# Altium PCB Battery PCB 8x4.PcbDoc
Units mm, origin at the board's own origin, x right, y up, seen from the top; angles counter-clockwise.
Board outline 138 x 291 mm, 2 copper layers (Top Layer, Bottom Layer), stack 1.571 mm thick; 37 components, 17 nets, 126 pads, 0 vias.
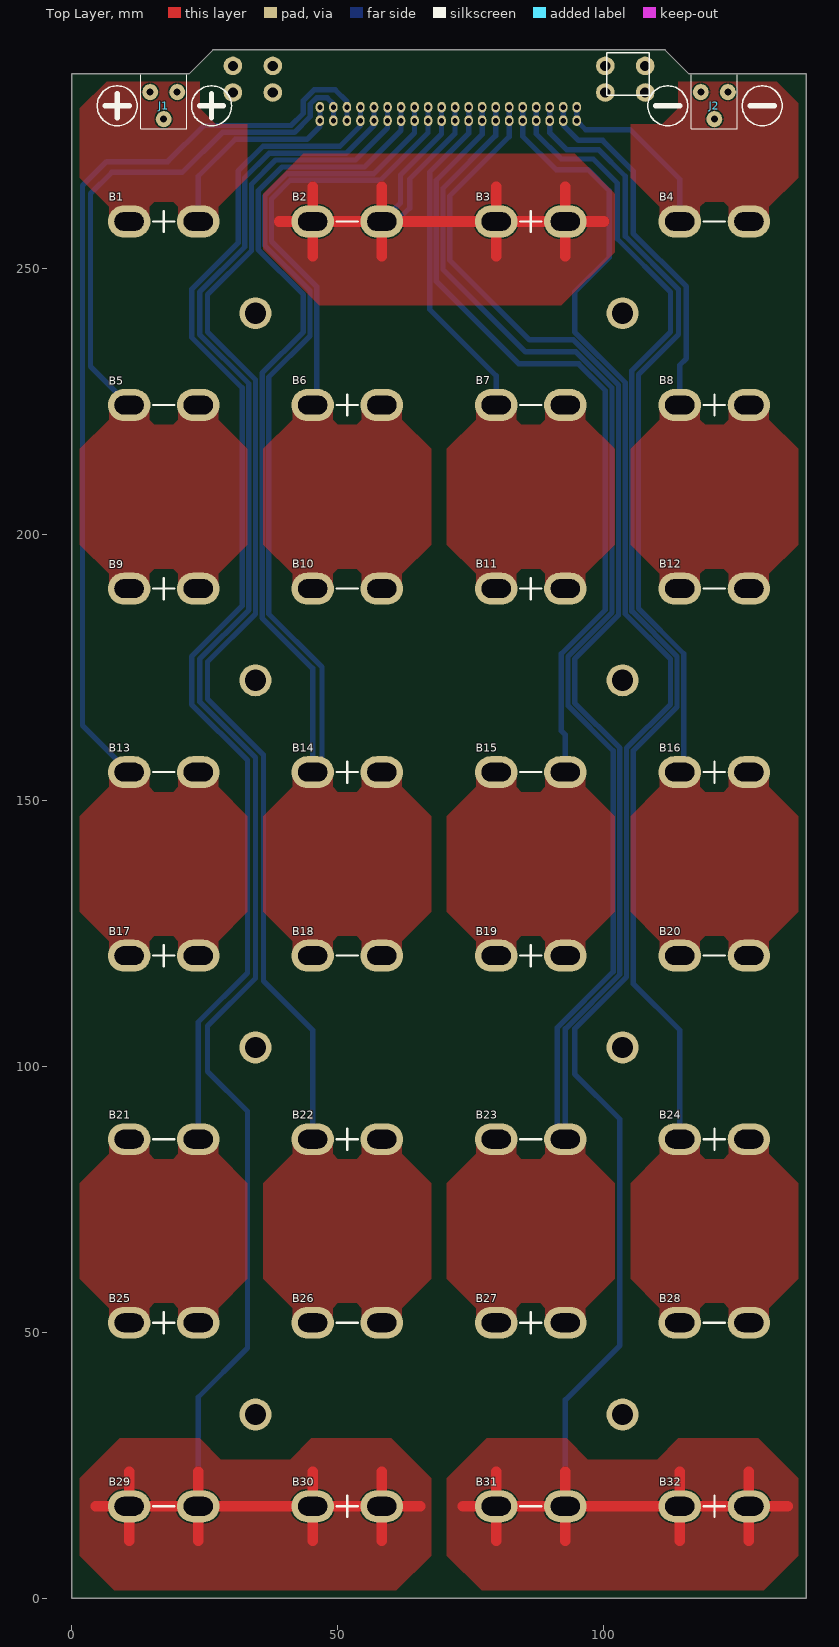
[diagram p0: Top Layer view]
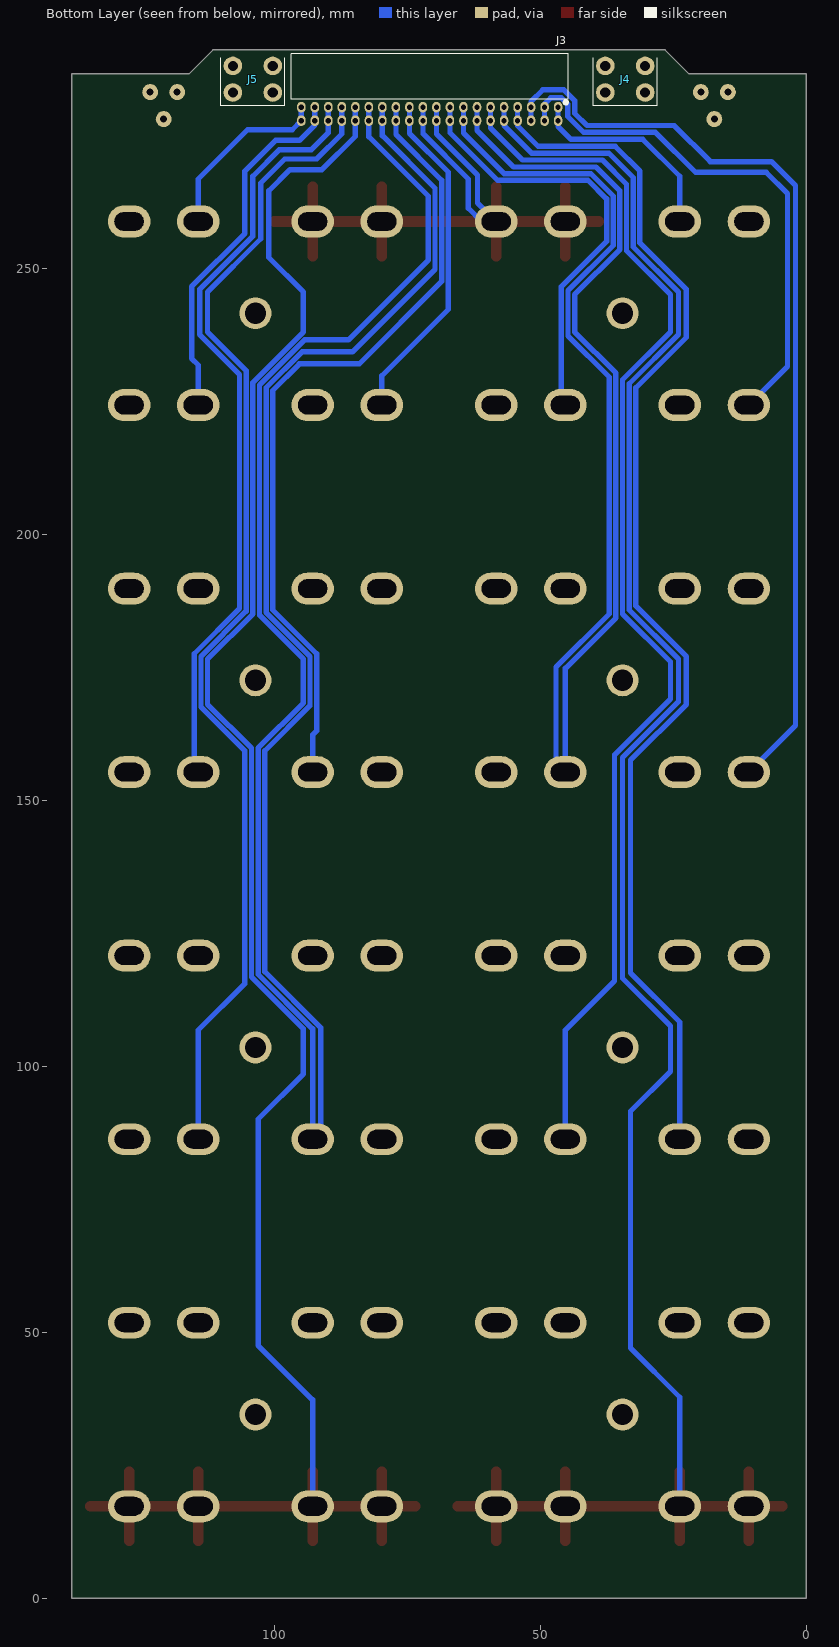
[diagram p1: Bottom Layer view, seen from below]

## Layer stack, top to bottom
Top Solder: solder mask 0.0102, Solder Resist, Dk 3.5
Top Layer: signal copper 0.0356
Dielectric 1: dielectric 1.5, FR-4, Dk 4.8
Bottom Layer: signal copper 0.0356
Bottom Solder: solder mask 0.0102, Solder Resist, Dk 3.5

## Board outline
0,0 0,286.5 22,286.5 26.5,291 111.5,291 116,286.5 138,286.5 138,0

## Design rules (kind name [scope] priority, off if disabled: settings)
Clearance [All] p1: gap=0.254 ignorepadtopadclearanceinfootprint=FALSE except(0: Arc-Hole Track-Hole SMDPad-Hole THPad-Hole Via-Hole Fill-Hole Poly-Hole Region-Hole Text-Hole)
PolygonConnect PolygonConnect_NoRelief [Name = 'NoRelief'] p1: connectstyle=Direct reliefconductorwidth=0.254 reliefentries=4 polygonreliefangle="90 Angle" airgapwidth=0.254
PolygonConnect [All] p2: connectstyle=Relief reliefconductorwidth=0.254 reliefentries=4 polygonreliefangle="90 Angle" airgapwidth=0.254
RoutingVias [All] p1: holewidth=0.711 width=1.27 viastyle="Through Hole" minholewidth=0.711 minwidth=1.27 maxholewidth=0.711 maxwidth=1.27
SolderMaskExpansion [All] p1: expansion=0.102 istentingtop=FALSE
Width [All] p1 off: maxlimit=0.254 minlimit=0.254 preferedwidth=0.254
30 further rules are at their usual default settings.

## Components (designator, comment, footprint, x,y, rotation, side; value= is the part's Value field where it differs from the comment)
B1 "Positive side of battery" BF_BATT_P 17.25,258.75 r180 top
B2 "Negative side of battery" BF_BATT_N 51.75,258.75 r180 top
B3 "Positive side of battery" BF_BATT_P 86.25,258.75 r180 top
B4 "Negative side of battery" BF_BATT_N 120.75,258.75 r180 top
B5 "Negative side of battery" BF_BATT_N 17.25,224.25 r180 top
B6 "Positive side of battery" BF_BATT_P 51.75,224.25 r180 top
B7 "Negative side of battery" BF_BATT_N 86.25,224.25 r180 top
B8 "Positive side of battery" BF_BATT_P 120.75,224.25 r180 top
B9 "Positive side of battery" BF_BATT_P 17.25,189.75 r180 top
B10 "Negative side of battery" BF_BATT_N 51.75,189.75 r180 top
B11 "Positive side of battery" BF_BATT_P 86.25,189.75 r180 top
B12 "Negative side of battery" BF_BATT_N 120.75,189.75 r180 top
B13 "Negative side of battery" BF_BATT_N 17.25,155.25 r180 top
B14 "Positive side of battery" BF_BATT_P 51.75,155.25 r180 top
B15 "Negative side of battery" BF_BATT_N 86.25,155.25 r180 top
B16 "Positive side of battery" BF_BATT_P 120.75,155.25 r180 top
B17 "Positive side of battery" BF_BATT_P 17.25,120.75 r180 top
B18 "Negative side of battery" BF_BATT_N 51.75,120.75 r180 top
B19 "Positive side of battery" BF_BATT_P 86.25,120.75 r180 top
B20 "Negative side of battery" BF_BATT_N 120.75,120.75 r180 top
B21 "Negative side of battery" BF_BATT_N 17.25,86.25 r180 top
B22 "Positive side of battery" BF_BATT_P 51.75,86.25 r180 top
B23 "Negative side of battery" BF_BATT_N 86.25,86.25 r180 top
B24 "Positive side of battery" BF_BATT_P 120.75,86.25 r180 top
B25 "Positive side of battery" BF_BATT_P 17.25,51.75 r180 top
B26 "Negative side of battery" BF_BATT_N 51.75,51.75 r180 top
B27 "Positive side of battery" BF_BATT_P 86.25,51.75 r180 top
B28 "Negative side of battery" BF_BATT_N 120.75,51.75 r180 top
B29 "Negative side of battery" BF_BATT_N 17.25,17.25 r180 top
B30 "Positive side of battery" BF_BATT_P 51.75,17.25 r180 top
B31 "Negative side of battery" BF_BATT_N 86.25,17.25 r180 top
B32 "Positive side of battery" BF_BATT_P 120.75,17.25 r180 top
J1 "Conn QC TAB 0.250 RA TH" 4910 17.25,278 r180 top value=4910
J2 "Conn QC TAB 0.250 RA TH" 4910 120.75,278 r180 top value=4910
J3 "Conn Recept 40Pos 0.1\" dual row TH RA" PPTC202LJBN-RC 70.75,280.25 r0 bottom value=PPTC202LJBN-RC
J4 "Conn Screw M3 RA TH" 7761 34,288 r270 bottom value=7761
J5 "Conn Screw M3 RA TH" 7761 104,288 r270 bottom value=7761

## Footprints (in the part's own frame and the unit in brackets; to place one, negate y for a bottom-side part, rotate by r counter-clockwise, add the part's x,y. Pads: shape width x height; smd on the part's side, far side on the other; paste and mask are expansions set on the pad)
4910 [mm] "Quick connect spade, RA TH"
  round 3 hole 1.32: 1(-2.54,-5.08) 1(0,0) 1(2.54,-5.08)
  silkscreen extent -4.3,-8.3 4.3,1.8, body extent -4,-17.6 4,0.5, height 0.8
7761 [mm] "Keystone Electronics M3 Screw Terminal RA"
  round 3.5 hole 1.9: 1(0,-3.75) 1(0,3.75) 1(5,-3.75) 1(5,3.75)
  silkscreen extent -1.5,-6 7.5,6, body extent -19.68,-4.68 6.52,4.73, height 7.94
BF_BATT_N [mm]
  oval 8x6 hole 3.5 slot 5.5 at 0 deg: 1(-6.5,0) 1(6.5,0)
  silkscreen extent -2,0 2,0
BF_BATT_P [mm]
  oval 8x6 hole 3.5 slot 5.5 at 0 deg: 1(-6.5,0) 1(6.5,0)
  silkscreen extent -2,-2 2,2
PPTC202LJBN-RC [mm]
  oval 1.6x2 hole 1: 1(-24.13,0) 2(-24.13,2.54) 3(-21.59,0) 4(-21.59,2.54) 5(-19.05,0) 6(-19.05,2.54) 7(-16.51,0) 8(-16.51,2.54) 9(-13.97,0) 10(-13.97,2.54) 11(-11.43,0) 12(-11.43,2.54) 13(-8.89,0) 14(-8.89,2.54) 15(-6.35,0) 16(-6.35,2.54) 17(-3.81,0) 18(-3.81,2.54) 19(-1.27,0) 20(-1.27,2.54) 21(1.27,0) 22(1.27,2.54) 23(3.81,0) 24(3.81,2.54) 25(6.35,0) 26(6.35,2.54) 27(8.89,0) 28(8.89,2.54) 29(11.43,0) 30(11.43,2.54) 31(13.97,0) 32(13.97,2.54) 33(16.51,0) 34(16.51,2.54) 35(19.05,0) 36(19.05,2.54) 37(21.59,0) 38(21.59,2.54) 39(24.13,0) 40(24.13,2.54)
  silkscreen extent -26,-10 26,-0.59, body extent -25.65,-10.1 25.65,-1.6, height 5.08

## Part data
B1 B3 B6 B8 B9 B11 B14 B16 B17 B19 B22 B24 B25 B27 B30 B32: library part BF_BATT_P, Dist=Digi-Key
B2 B4 B5 B7 B10 B12 B13 B15 B18 B20 B21 B23 B26 B28 B29 B31: library part BF_BATT_N, Dist=Digi-Key
J1 J2: library part 4910, Dist=Digi-Key, Dist P/N=36-4910-ND, HelpURL=https://www.keyelco.com/userAssets/file/M65p59.pdf, Mfg="Keystone Electronics", Mfgr P/N=4910, Price=2.75
J3: library part PPTC202LJBN-RC, Dist=Digi-Key, Dist P/N=S5534-ND, HelpURL=https://drawings-pdf.s3.amazonaws.com/10494.pdf, Mfg="Sullins Connector Solutions", Mfgr P/N=PPTC202LJBN-RC, Price=2.75
J4 J5: library part 7761, Dist=Digi-Key, Dist P/N=36-7761-ND, HelpURL=https://www.keyelco.com/userAssets/file/M65p69.pdf, Mfg="Keystone Electronics", Mfgr P/N=7761, Price=0.77

## Free pads (board coordinates)
  round 6 hole 4: ""(34.5,34.5) ""(34.5,103.5) ""(34.5,172.5) ""(34.5,241.5) ""(103.5,34.5) ""(103.5,103.5) ""(103.5,172.5) ""(103.5,241.5)

## Nets (pads, with @x,y where several pads share a name; then routed paths per layer and width w, separated by ;. In a path a pad name is that pad's centre, name@x,y a point inside that pad or via, vN(x,y) a via of type N, cw(c..) or ccw(c..) an arc to the next point about the centre after c; other vN are vias at no path point)
0: B4.1 J2.1 J3.39 J3.40 | length 34.4
  Bottom Layer w1: J3.39 J3.40 96.59,276 105,276 114.25,266.75 B4.1@114.25,258.75
2: B8.1 B12.1 J3.37 J3.38 | length 68.7
  Bottom Layer w1: J3.37 J3.38 92.34,276.91 95.25,274 99.75,274 105.5,268.25 105.5,256.5 115.5,246.5 115.5,233 114.25,231.75 B8.1@114.25,224.25
4: B16.1 B20.1 J3.35 J3.36 | length 145.5
  Bottom Layer w1: J3.35 J3.36 89.8,275.45 93,272.25 99,272.25 104,267.25 104,256 114,246 114,237.5 106.5,230 106.5,186 115,177.5 115,156 B16.1@114.25,155.25
6: B24.1 B28.1 J3.33 J3.34 | length 221.5
  Bottom Layer w1: J3.33 J3.34 87.26,275.24 92,270.5 98,270.5 102.5,266 102.5,255.5 112.5,245.5 112.5,238 105.25,230.75 105.25,185.5 113.75,177 113.75,167.5 105.5,159.25 105.5,115.5 114.25,106.75 B24.1@114.25,86.25
8: B31.1 B32.1 J3.31 J3.32 | length 411.6
  Top Layer w2: 73.5,17.25 B31.1@79.75,17.25 ; 79.75,10.75 B31.1@79.75,17.25 ; 79.75,23.75 B31.1@79.75,17.25 ; 92.75,10.75 B31.1@92.75,17.25 ; 92.75,23.75 B31.1@92.75,17.25 ; 114.25,10.75 B32.1@114.25,17.25 ; 114.25,23.75 B32.1@114.25,17.25 ; 127.25,10.75 B32.1@127.25,17.25 ; 127.25,23.75 B32.1@127.25,17.25 ; 134.5,17.25 B32.1@127.25,17.25 ; B31.1@79.75,17.25 B31.1@92.75,17.25 ; B31.1@92.75,17.25 B32.1@114.25,17.25 ; B32.1@114.25,17.25 B32.1@127.25,17.25
  Bottom Layer w1: J3.31 J3.32 84.72,274.78 91,268.5 97,268.5 101,264.5 101,252 94.5,245.5 94.5,238 104,228.5 104,185 112.5,176.5 112.5,168 104.25,159.75 104.25,116.75 94.5,107 94.5,98.5 103,90 103,47.5 92.75,37.25 B31.1@92.75,17.25
10: B23.1 B27.1 J3.27 J3.28 J3.29 J3.30 | length 456.5
  Bottom Layer w1: J3.27 J3.28 79.64,274.89 69.75,265 69.75,249.75 85.25,234.25 94.75,234.25 101.5,227.5 101.5,185.25 93.25,177 93.25,167.75 101.75,159.25 101.75,117.75 91.25,107.25 91.25,87.75 92.75,86.25 92.75,107 103,117.25 103,159.75 94.5,168.25 94.5,176.5 102.75,184.75 102.75,228 94.25,236.5 86,236.5 71,251.5 71,263.5 82.18,274.68 J3.30 J3.29
12: B15.1 B19.1 J3.25 J3.26 | length 152
  Bottom Layer w1: J3.25 J3.26 77.1,275.1 68.5,266.5 68.5,247.5 84,232 95.25,232 100.25,227 100.25,185.75 92,177.5 92,163 92.75,162.25 B15.1@92.75,155.25
14: B7.1 B11.1 J3.23 J3.24 | length 64.2
  Bottom Layer w1: J3.23 J3.24 74.56,275.31 67.25,268 67.25,242.25 79.75,229.75 B7.1@79.75,224.25
16: B2.1 B3.1 J3.19 J3.20 J3.21 J3.22 | length 168
  Top Layer w2: 39,258.75 45.25,258.75 B2.1@58.25,258.75 ; 45.25,252.25 45.25,265.25 ; 58.25,252.25 B2.1@58.25,258.75 ; 58.25,265.25 B2.1@58.25,258.75 ; 79.75,252.25 79.75,265.25 ; 92.75,252.25 92.75,265.25 ; 100,258.75 92.75,258.75 79.75,258.75 B2.1@58.25,258.75
  Bottom Layer w1: J3.19 J3.20 69.48,275.23 61.75,267.5 61.75,262.25 58.25,258.75 61,258.75 63.5,261.25 63.5,266.75 72.02,275.27 J3.22 J3.21
18: B6.1 B10.1 J3.17 J3.18 | length 82
  Bottom Layer w1: B6.1@45.25,224.25 46,225 46,246.5 37.5,255 37.5,263 41,266.5 42,266.5 58,266.5 66.94,275.44 J3.18 J3.17
20: B14.1 B18.1 J3.13 J3.14 J3.15 J3.16 | length 313.7
  Bottom Layer w1: J3.13 J3.14 61.86,275.86 55,269 39.5,269 35,264.5 35,253.5 43.5,245 43.5,238 35.75,230.25 35.75,184.25 45.25,174.75 45.25,155.25 47,157 47,175 37,185 37,229.5 44.75,237.25 44.75,245.75 36.25,254.25 36.25,263.5 36.246,263.5 36.246,263.519 40.481,267.754 56.754,267.754 64.4,275.4 J3.16 J3.15
22: B22.1 B26.1 J3.11 J3.12 | length 232.4
  Bottom Layer w1: B22.1@45.25,86.25 45.25,106.75 36,116 36,158.5 25.5,169 25.5,176 34.5,185 34.5,229 25.5,238 25.5,245 33.746,253.246 33.746,265.746 38.3,270.3 53.3,270.3 59.32,276.32 J3.12 J3.11
24: B29.1 B30.1 J3.9 J3.10 | length 420.8
  Top Layer w2: 4.5,17.25 10.75,17.25 B29.1@23.75,17.25 ; 10.75,10.75 10.75,23.75 ; 23.75,10.75 B29.1@23.75,17.25 ; 23.75,23.75 B29.1@23.75,17.25 ; 45.25,10.75 45.25,23.75 ; 58.25,10.75 58.25,23.75 ; 65.5,17.25 58.25,17.25 45.25,17.25 B29.1@23.75,17.25
  Bottom Layer w1: B29.1@23.75,17.25 23.75,37.75 33,47 33,91.5 25.5,99 25.5,107.5 34.5,116.5 34.5,158 24,168.5 24,176.5 33.25,185.75 33.25,228.25 24,237.5 24,245.5 32.492,253.992 32.492,266.992 37.1,271.6 51.6,271.6 56.78,276.78 J3.10 J3.9
26: B21.1 B25.1 J3.7 J3.8 | length 231.7
  Bottom Layer w1: B21.1@23.75,86.25 23.75,108.25 33,117.5 33,157.5 22.5,168 22.5,177 32,186.5 32,227.5 22.5,237 22.5,246 31.238,254.738 31.238,268.238 35.9,272.9 50.4,272.9 54.24,276.74 J3.8 J3.7
28: B13.1 B17.1 J3.5 J3.6 | length 176.9
  Bottom Layer w1: B13.1@10.75,155.25 2,164 2,265.5 6.5,270 18,270 24.8,276.8 41.2,276.8 43.5,279.1 43.5,281.5 45.5,283.5 49.5,283.5 51.7,281.3 J3.5 J3.6
30: B5.1 B9.1 J3.3 J3.4 | length 100.8
  Bottom Layer w1: B5.1@10.75,224.25 3.5,231.5 3.5,264 7.5,268 20.8,268 28.3,275.5 41.8,275.5 44.8,278.5 44.8,280.8 46,282 48,282 49.16,280.84 J3.3 J3.4
32: B1.1 J1.1 J3.1 J3.2 | length 38.9
  Bottom Layer w1: B1.1@23.75,258.75 23.75,267.25 30.7,274.2 44.2,274.2 46.62,276.62 J3.2 J3.1
pads on no net: J4.1 J5.1

## Polygon pours and split planes (outlines as drawn)
32 on Top Layer "NONET_L01_P-001" (solid, pour order 16): 1.5,272 1.5,280 6.5,285 29,285 33,281 33,272
8 on Top Layer "NONET_L01_P-001" (solid, pour order 14): 78,30 70.5,22.5 70.5,8 77,1.5 130,1.5 136.5,8 136.5,22.5 129,30 114,30 110,26 97,26 93,30
24 on Top Layer "NONET_L01_P-001" (solid, pour order 13): 9,30 1.5,22.5 1.5,8 8,1.5 61,1.5 67.5,8 67.5,22.5 60,30 45,30 41,26 28,26 24,30
6 on Top Layer "NoRelief" (solid, pour order 12): 110.5,86 110.5,83.5 105,78 105,60 110.5,54.5 110.5,52 118,52 118,54.498 118.998,55.5 122.5,55.5 123.5,54.5 123.5,52 131,52 131,54.5 136.5,60 136.5,78 131,83.5 131,86 123.5,86 123.5,83.5 122.5,82.5 119,82.5 118,83.5 118,86
4 on Top Layer "NoRelief" (solid, pour order 11): 110.5,155 110.5,152.5 105,147 105,129 110.5,123.5 110.5,121 118,121 118,123.498 118.998,124.5 122.5,124.5 123.5,123.5 123.5,121 131,121 131,123.5 136.5,129 136.5,147 131,152.5 131,155 123.5,155 123.5,152.5 122.5,151.5 119,151.5 118,152.5 118,155
2 on Top Layer "NoRelief" (solid, pour order 10): 110.5,224 110.5,221.5 105,216 105,198 110.5,192.5 110.5,190 118,190 118,192.498 118.998,193.5 122.5,193.5 123.5,192.5 123.5,190 131,190 131,192.5 136.5,198 136.5,216 131,221.5 131,224 123.5,224 123.5,221.5 122.5,220.5 119,220.5 118,221.5 118,224
10 on Top Layer "NoRelief" (solid, pour order 9): 76,86 76,83.5 70.5,78 70.5,60 76,54.5 76,52 83.5,52 83.5,54.498 84.498,55.5 88,55.5 89,54.5 89,52 96.5,52 96.5,54.5 102,60 102,78 96.5,83.5 96.5,86 89,86 89,83.5 88,82.5 84.5,82.5 83.5,83.5 83.5,86
12 on Top Layer "NoRelief" (solid, pour order 8): 76,155 76,152.5 70.5,147 70.5,129 76,123.5 76,121 83.5,121 83.5,123.498 84.498,124.5 88,124.5 89,123.5 89,121 96.5,121 96.5,123.5 102,129 102,147 96.5,152.5 96.5,155 89,155 89,152.5 88,151.5 84.5,151.5 83.5,152.5 83.5,155
14 on Top Layer "NoRelief" (solid, pour order 7): 76,224 76,221.5 70.5,216 70.5,198 76,192.5 76,190 83.5,190 83.5,192.498 84.498,193.5 88,193.5 89,192.5 89,190 96.5,190 96.5,192.5 102,198 102,216 96.5,221.5 96.5,224 89,224 89,221.5 88,220.5 84.5,220.5 83.5,221.5 83.5,224
22 on Top Layer "NoRelief" (solid, pour order 6): 41.5,86 41.5,83.5 36,78 36,60 41.5,54.5 41.5,52 49,52 49,54.498 49.998,55.5 53.5,55.5 54.5,54.5 54.5,52 62,52 62,54.5 67.5,60 67.5,78 62,83.5 62,86 54.5,86 54.5,83.5 53.5,82.5 50,82.5 49,83.5 49,86
20 on Top Layer "NoRelief" (solid, pour order 5): 41.5,155 41.5,152.5 36,147 36,129 41.5,123.5 41.5,121 49,121 49,123.498 49.998,124.5 53.5,124.5 54.5,123.5 54.5,121 62,121 62,123.5 67.5,129 67.5,147 62,152.5 62,155 54.5,155 54.5,152.5 53.5,151.5 50,151.5 49,152.5 49,155
18 on Top Layer "NoRelief" (solid, pour order 4): 41.5,224 41.5,221.5 36,216 36,198 41.5,192.5 41.5,190 49,190 49,192.498 49.998,193.5 53.5,193.5 54.5,192.5 54.5,190 62,190 62,192.5 67.5,198 67.5,216 62,221.5 62,224 54.5,224 54.5,221.5 53.5,220.5 50,220.5 49,221.5 49,224
26 on Top Layer "NoRelief" (solid, pour order 3): 7,86 7,83.5 1.5,78 1.5,60 7,54.5 7,52 14.5,52 14.5,54.498 15.498,55.5 19,55.5 20,54.5 20,52 27.5,52 27.5,54.5 33,60 33,78 27.5,83.5 27.5,86 20,86 20,83.5 19,82.5 15.5,82.5 14.5,83.5 14.5,86
28 on Top Layer "NoRelief" (solid, pour order 2): 7,155 7,152.5 1.5,147 1.5,129 7,123.5 7,121 14.5,121 14.5,123.498 15.498,124.5 19,124.5 20,123.5 20,121 27.5,121 27.5,123.5 33,129 33,147 27.5,152.5 27.5,155 20,155 20,152.5 19,151.5 15.5,151.5 14.5,152.5 14.5,155
30 on Top Layer "NoRelief" (solid, pour order 1): 7,224 7,221.5 1.5,216 1.5,198 7,192.5 7,190 14.5,190 14.5,192.498 15.498,193.5 19,193.5 20,192.5 20,190 27.5,190 27.5,192.5 33,198 33,216 27.5,221.5 27.5,224 20,224 20,221.5 19,220.5 15.5,220.5 14.5,221.5 14.5,224
0 on Top Layer "NONET_L01_P-001" (solid, pour order 18): 105,272 105,280 110,285 132.5,285 136.5,281 136.5,272
0 on Top Layer "NoRelief" (solid, pour order 17): 131,259 131,261.5 136.5,267 136.5,274 105,274 105,267 110.5,261.5 110.5,259 118,259 118,261.5 119,262.5 122.5,262.5 123.5,261.5 123.5,259
16 on Top Layer "NONET_L01_P-001" (solid, pour order 15): 43.5,271.5 36,264 36,253.5 46.5,243 92,243 102,253 102,264 94.5,271.5 79.5,271.5 58.5,271.5
32 on Top Layer "NoRelief" (solid, pour order 0): 27.5,259 27.5,261.5 33,267 33,274 1.5,274 1.5,267 7,261.5 7,259 14.5,259 14.5,261.5 15.5,262.5 19,262.5 20,261.5 20,259

## Other copper
Multi-Layer:
  pour cut-out: 114,286 114,280 111,277 104,277 104,286
  pour cut-out: 24,286 24,280 27,277 34,277 34,286

## Silkscreen, mask and mechanical layers (free items; w line width, h text height)
Top Overlay:
  circle w0.254: c26.25,280.5 r3.75
  circle w0.254: c8.5,280.5 r3.75
  circle w0.254: c112,280.5 r3.75
  circle w0.254: c129.75,280.5 r3.75
  lines w0.254: 100.5,282.5 108.5,282.5 108.5,290.5 100.5,290.5 100.5,282.5
  lines w1: 6.25,280.5 10.75,280.5 ; 8.5,278.25 8.5,282.75 ; 24,280.5 28.5,280.5 ; 26.25,278.25 26.25,282.75 ; 109.75,280.5 114.25,280.5 ; 127.5,280.5 132,280.5
Mechanical 1:
  the board outline again, w0.254
Mechanical 2:
  circle w0.254: c17.25,51.75 r17.25
  circle w0.254: c17.25,17.25 r17.25
  lines w0.254: 15.75,17.25 18.75,17.25 ; 15.75,51.75 18.75,51.75 ; 15.75,86.25 18.75,86.25 ; 15.75,120.75 18.75,120.75 ; 15.75,155.25 18.75,155.25 ; 15.75,189.75 18.75,189.75 ; 15.75,224.25 18.75,224.25 ; 15.75,258.75 18.75,258.75 ; 17.25,15.75 17.25,18.75 ; 17.25,17.25 51.75,51.75 ; 17.25,50.25 17.25,53.25 ; 17.25,51.75 51.75,17.25 ; 17.25,84.75 17.25,87.75 ; 17.25,119.25 17.25,122.25 ; 17.25,153.75 17.25,156.75 ; 17.25,188.25 17.25,191.25 ; 17.25,222.75 17.25,225.75 ; 17.25,257.25 17.25,260.25 ; 50.25,17.25 53.25,17.25 ; 50.25,51.75 53.25,51.75 ; 50.25,86.25 53.25,86.25 ; 50.25,120.75 53.25,120.75 ; 50.25,155.25 53.25,155.25 ; 50.25,189.75 53.25,189.75 ; 50.25,224.25 53.25,224.25 ; 50.25,258.75 53.25,258.75 ; 51.75,15.75 51.75,18.75 ; 51.75,50.25 51.75,53.25 ; 51.75,84.75 51.75,87.75 ; 51.75,119.25 51.75,122.25 ; 51.75,153.75 51.75,156.75 ; 51.75,188.25 51.75,191.25 ; 51.75,222.75 51.75,225.75 ; 51.75,257.25 51.75,260.25 ; 84.75,17.25 87.75,17.25 ; 84.75,51.75 87.75,51.75 ; 84.75,86.25 87.75,86.25 ; 84.75,120.75 87.75,120.75 ; 84.75,155.25 87.75,155.25 ; 84.75,189.75 87.75,189.75 ; 84.75,224.25 87.75,224.25 ; 84.75,258.75 87.75,258.75 ; 86.25,15.75 86.25,18.75 ; 86.25,50.25 86.25,53.25 ; 86.25,84.75 86.25,87.75 ; 86.25,119.25 86.25,122.25 ; 86.25,153.75 86.25,156.75 ; 86.25,188.25 86.25,191.25 ; 86.25,222.75 86.25,225.75 ; 86.25,257.25 86.25,260.25 ; 119.25,17.25 122.25,17.25 ; 119.25,51.75 122.25,51.75 ; 119.25,86.25 122.25,86.25 ; 119.25,120.75 122.25,120.75 ; 119.25,155.25 122.25,155.25 ; 119.25,189.75 122.25,189.75 ; 119.25,224.25 122.25,224.25 ; 119.25,258.75 122.25,258.75 ; 120.75,15.75 120.75,18.75 ; 120.75,50.25 120.75,53.25 ; 120.75,84.75 120.75,87.75 ; 120.75,119.25 120.75,122.25 ; 120.75,153.75 120.75,156.75 ; 120.75,188.25 120.75,191.25 ; 120.75,222.75 120.75,225.75 ; 120.75,257.25 120.75,260.25

## Dimensions
97,290.5 to 97,293 on Top Overlay